# EAGLE board vco (EAGLE 9.2.2)
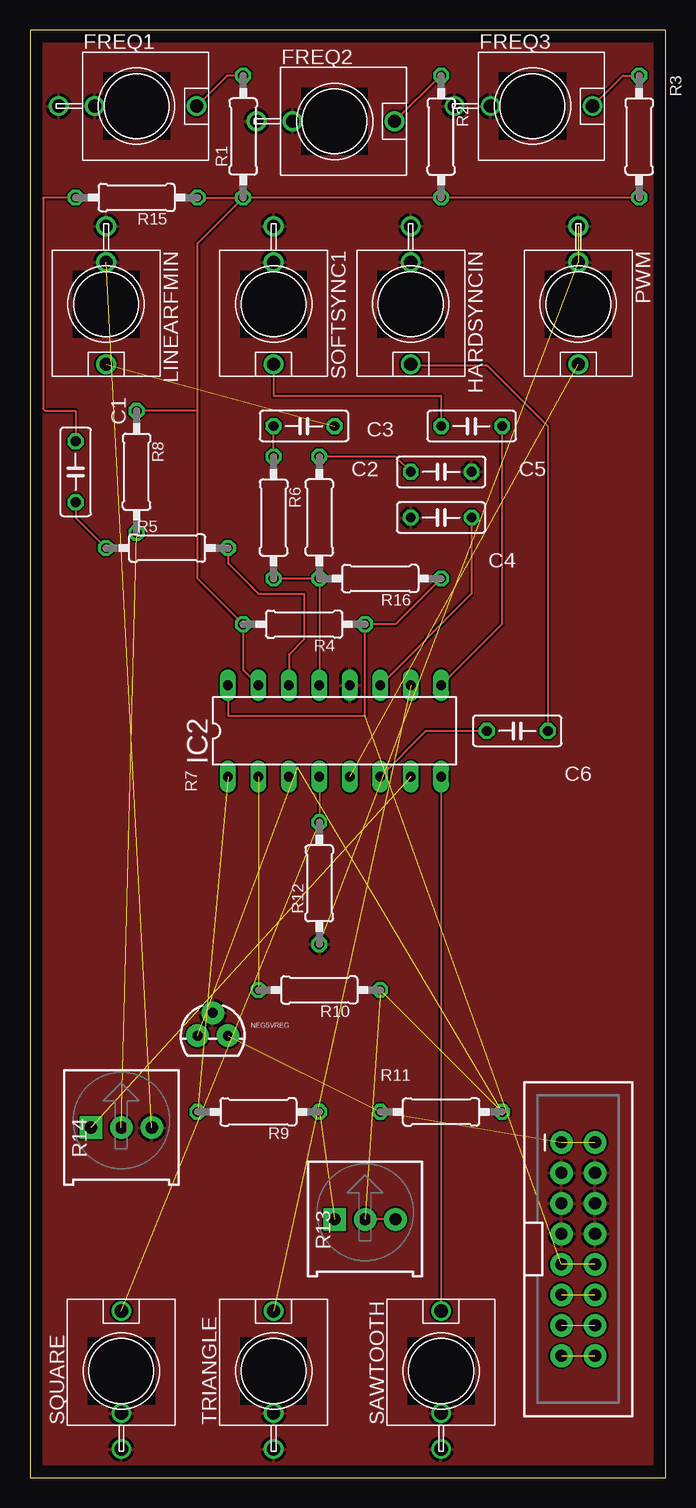
[diagram p0: board, top side]
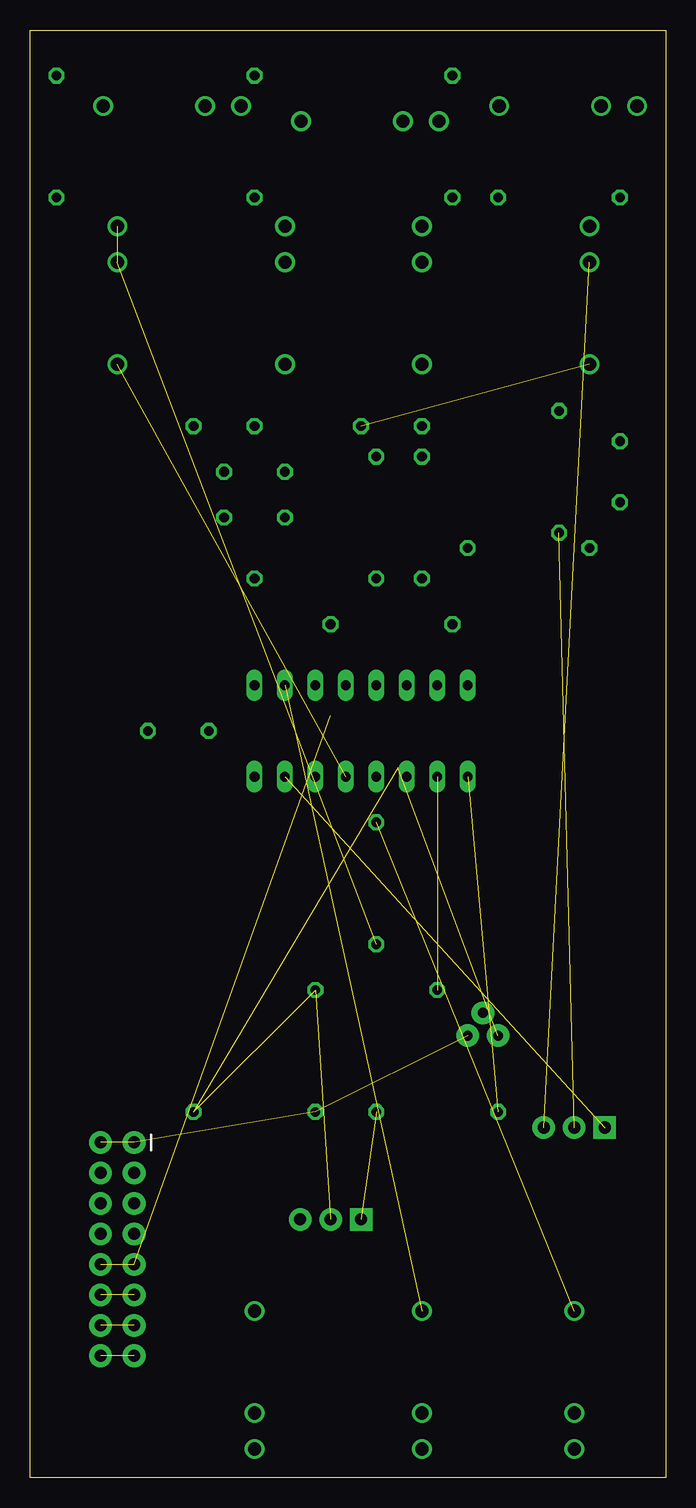
[diagram p1: board, bottom side, seen from below]

Size 53.01 x 120.64 mm. Coordinates in mm from the lower left corner, seen from the top.
Outline: 0,0 53.01,0 53.01,120.64 0,120.64 0,0
Copper layers (1*16): Top 0.035mm / dielectric 1.5mm / Bottom 0.035mm
Design rules "default": minimum track width 6mil, minimum drill 0.35mm, track to track 6mil, track to pad 6mil, pad to pad 6mil, via to via 6mil, smd to smd 6mil, copper to edge 40mil, drill to drill 6mil, minimum pad ring 10mil, minimum via ring 8mil, stop-mask expansion 4mil, vias tented up to drill 0mil, thermal gap 10mil

## Footprints (pad centres in the part's own frame; a part is rotated, then mirrored left to right if it is on the bottom)
C050-025X075 = drill 0.813 octagon: 1 -2.54,0; 2 2.54,0
WQP-PJ301M-12_JACK = drill 1.1: P$1 0,5; P$2 0,-3.5; P$3 0,-6.5
DIL16 = drill 0.813 long: 1 -8.89,-3.81; 2 -6.35,-3.81; 3 -3.81,-3.81; 4 -1.27,-3.81; 5 1.27,-3.81; 6 3.81,-3.81; 7 6.35,-3.81; 8 8.89,-3.81; 9 8.89,3.81; 10 6.35,3.81; 11 3.81,3.81; 12 1.27,3.81; 13 -1.27,3.81; 14 -3.81,3.81; 15 -6.35,3.81; 16 -8.89,3.81
2X8-SHROUDED_LOCK = drill 1.016 pad 1.88: 1 -1.397,8.89; 2 1.397,8.89; 3 -1.397,6.35; 4 1.397,6.35; 5 -1.397,3.81; 6 1.397,3.81; 7 -1.397,1.27; 8 1.397,1.27; 9 -1.397,-1.27; 10 1.397,-1.27; 11 -1.397,-3.81; 12 1.397,-3.81; 13 -1.397,-6.35; 14 1.397,-6.35; 15 -1.397,-8.89; 16 1.397,-8.89
TO-92 = drill 0.813 pad 1.88: 1 -1.27,0; 2 0,1.905; 3 1.27,0
0207/10 = drill 0.813 octagon: 1 -5.08,0; 2 5.08,0
TRIMPOT-PTH-3386U = drill 1.016 pad 1.88 square: 1 -2.54,-0.015 | drill 1.016 pad 1.88: 2 0,-0.015; 3 2.54,-0.015

## Placement (x,y rotation side)
C1  .01u  [C050-025X075]  3.81,83.82 270 top
C2  .1u  [C050-025X075]  22.86,87.63 180 top
C3  .01u  [C050-025X075]  34.29,83.82 0 top
C4  1000p  [C050-025X075]  34.29,80.01 180 top
C5  .001u  [C050-025X075]  36.83,87.63 180 top
C6  .001u  [C050-025X075]  40.64,62.23 180 top
FREQ1  WQP-PJ301M-12_JACK  [WQP-PJ301M-12_JACK]  8.89,114.3 270 top
FREQ2  WQP-PJ301M-12_JACK  [WQP-PJ301M-12_JACK]  25.4,113.03 270 top
FREQ3  WQP-PJ301M-12_JACK  [WQP-PJ301M-12_JACK]  41.91,114.3 270 top
HARDSYNCIN  WQP-PJ301M-12_JACK  [WQP-PJ301M-12_JACK]  31.75,97.79 180 top
IC2  CEM3340  [DIL16]  25.4,62.23 0 top
J3  [2X8-SHROUDED_LOCK]  45.72,19.05 0 top
LINEARFMIN  WQP-PJ301M-12_JACK  [WQP-PJ301M-12_JACK]  6.35,97.79 180 top
NEG5VREG  [TO-92]  15.24,36.83 0 top
PWM  WQP-PJ301M-12_JACK  [WQP-PJ301M-12_JACK]  45.72,97.79 180 top
R1  100K  [0207/10]  17.78,111.76 90 top
R2  100K  [0207/10]  34.29,111.76 270 top
R3  100K  [0207/10]  50.8,111.76 270 top
R4  360K  [0207/10]  22.86,71.12 180 top
R5  1.8K  [0207/10]  11.43,77.47 0 top
R6  1M  [0207/10]  20.32,80.01 270 top
R7  [0207/10]  24.13,80.01 90 top
R8  1M  [0207/10]  8.89,83.82 270 top
R9  24K  [0207/10]  19.05,30.48 180 top
R10  5.6K  [0207/10]  24.13,40.64 180 top
R11  820  [0207/10]  34.29,30.48 0 top
R12  10K  [0207/10]  24.13,49.53 90 top
R13  10k  [TRIMPOT-PTH-3386U]  27.94,21.55 0 top
R14  10k  [TRIMPOT-PTH-3386U]  7.62,29.2 0 top
R15  470  [0207/10]  8.89,106.68 180 top
R16  1.5M  [0207/10]  29.21,74.93 180 top
SAWTOOTH  WQP-PJ301M-12_JACK  [WQP-PJ301M-12_JACK]  34.29,8.89 0 top
SOFTSYNC1  WQP-PJ301M-12_JACK  [WQP-PJ301M-12_JACK]  20.32,97.79 180 top
SQUARE  WQP-PJ301M-12_JACK  [WQP-PJ301M-12_JACK]  7.62,8.89 0 top
TRIANGLE  WQP-PJ301M-12_JACK  [WQP-PJ301M-12_JACK]  20.32,8.89 0 top

## Library data of the parts
C1-C6 = rcl; SPICEPREFIX: C
FREQ1 FREQ3 HARDSYNCIN LINEARFMIN PWM SAWTOOTH SOFTSYNC1 SQUARE TRIANGLE = thonkiconn
FREQ2 = thonkiconn; SPICEPREFIX: U
IC2 = CEM
J3 = SparkFun-Connectors
NEG5VREG = SparkFun-IC-Power
R1-R12 R15 R16 = rcl; SPICEPREFIX: R
R13 R14 = SparkFun-Resistors; PROD_ID: RES-09730; SF_SKU: COM-09806

## Nets
+5V: J3.11 J3.12
+12V: IC2.16 J3.9 J3.10 R4.1 R16.1
-12V: J3.1 J3.2 NEG5VREG.3 R11.1
CV: J3.13 J3.14
GATE: J3.15 J3.16
GND: C3.2 C4.2 FREQ1.P$2 FREQ1.P$3 FREQ2.P$2 FREQ2.P$3 FREQ3.P$2 FREQ3.P$3 HARDSYNCIN.P$2 HARDSYNCIN.P$3 IC2.12 J3.3 J3.4 J3.5 J3.6 J3.7 J3.8 LINEARFMIN.P$2 LINEARFMIN.P$3 NEG5VREG.2 PWM.P$2 PWM.P$3 R12.1 R14.3 SAWTOOTH.P$2 SAWTOOTH.P$3 SOFTSYNC1.P$2 SOFTSYNC1.P$3 SQUARE.P$2 SQUARE.P$3 TRIANGLE.P$2 TRIANGLE.P$3
N$1: IC2.2 R10.2
N$2: C1.1 R15.2
N$3: IC2.14 R5.2
N$4: IC2.13 R6.2 R7.1 R16.2
N$5: C2.2 R6.1
N$6: C3.1 R7.2
N$7: C4.1 IC2.11
N$8: IC2.1 R9.2
N$9: C5.1 IC2.9
N$10: R8.2 R14.2
N$11: R9.1 R13.1
N$12: IC2.3 NEG5VREG.1 R10.1 R11.2 R13.2 R13.3
N$13: IC2.7 R14.1
N$14: FREQ1.P$1 R1.2
N$15: C6.2 IC2.6
N$18: IC2.4 R12.2 SQUARE.P$1
N$20: FREQ2.P$1 R2.1
N$21: IC2.15 R1.1 R2.2 R3.2 R4.2 R8.1 R15.1
N$22: FREQ3.P$1 R3.1
N$23: IC2.10 TRIANGLE.P$1
N$24: C2.1 LINEARFMIN.P$1
N$29: C5.2 SOFTSYNC1.P$1
N$31: IC2.8 SAWTOOTH.P$1
N$34: C6.1 HARDSYNCIN.P$1
N$35: IC2.5 PWM.P$1
PE: C1.2 R5.1

## Tracks (layer width: path | path; a pad name or v marks a point on that pad's centre or on a via)
+5V  (1 unrouted)
+12V  (2 unrouted)
  Top 0.152: IC2.16 16.51,63.5 27.94,63.5 R4.1 30.48,71.12 R16.1
-12V  (3 unrouted)
CV  (1 unrouted)
GATE  (1 unrouted)
GND  (3 unrouted)
  pour Top: 0,120.65 53.34,120.65 53.34,0 0,0
N$1  (1 unrouted)
N$2
  Top 0.152: R15.2 1.09,106.68 1.09,89.08 1.27,88.9 3.81,88.9 C1.1
N$3
  Top 0.152: R5.2 16.51,76.2 19.05,73.66 22.86,73.66 22.86,69.85 21.59,68.58 IC2.14
N$4
  Top 0.152: IC2.13 R7.1 R6.2
N$5
  Top 0.152: R6.1 C2.2
N$6
  Top 0.152: C3.1 30.48,85.09 R7.2
N$7
  Top 0.152: C4.1 36.83,73.66 IC2.11
N$8  (1 unrouted)
  Top 0.152: R9.2 13.59,30.86
N$9
  Top 0.152: C5.1 39.37,71.12 IC2.9
N$10  (1 unrouted)
N$11  (1 unrouted)
N$12  (4 unrouted)
  Top 0.152: IC2.3 22.33,59.16 | R13.3 R13.2
N$13  (1 unrouted)
N$14
  Top 0.152: R1.2 16.43,116.84 FREQ1.P$1
N$15
  Top 0.152: IC2.6 33.02,62.23 C6.2
N$18  (1 unrouted)
  Top 0.152: IC2.4 R12.2
N$20
  Top 0.152: R2.1 34.21,116.84 FREQ2.P$1
N$21
  Top 0.152: R3.2 R2.2 R1.1 | R15.1 R1.1 | R1.1 13.97,102.87 13.97,88.9 | 13.97,88.9 R8.1 | 13.97,88.9 13.97,74.93 R4.2 17.78,67.31 IC2.15
N$22
  Top 0.152: FREQ3.P$1 49.45,116.84 R3.1
N$23  (1 unrouted)
  Top 0.152: 31.75,67.31 IC2.10
N$24  (1 unrouted)
N$29
  Top 0.152: SOFTSYNC1.P$1 20.32,90.17 34.29,90.17 C5.2
N$31
  Top 0.152: IC2.8 SAWTOOTH.P$1
N$34
  Top 0.152: HARDSYNCIN.P$1 31.83,92.71 38.1,92.71 43.18,87.63 C6.1
N$35  (1 unrouted)
PE
  Top 0.152: C1.2 3.81,80.01 R5.1